# EAGLE board simple-bug-bc547 (EAGLE 7.6.0)
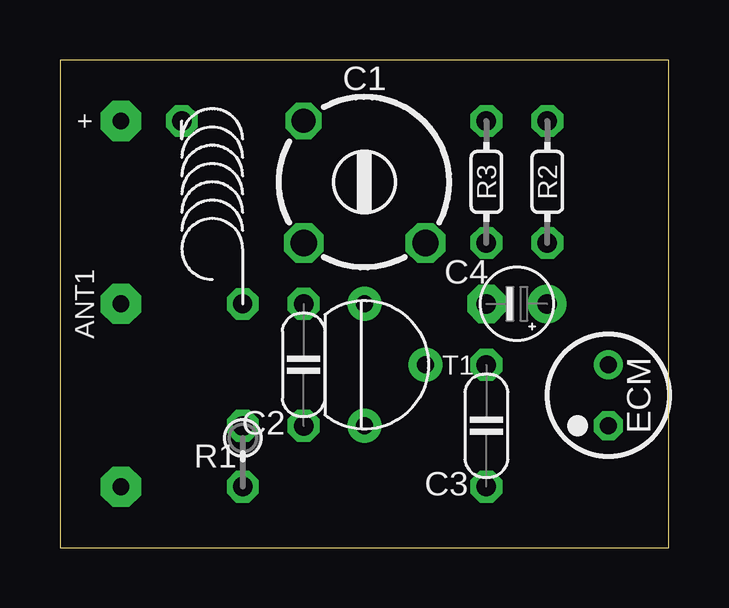
[diagram p0: board, top side]
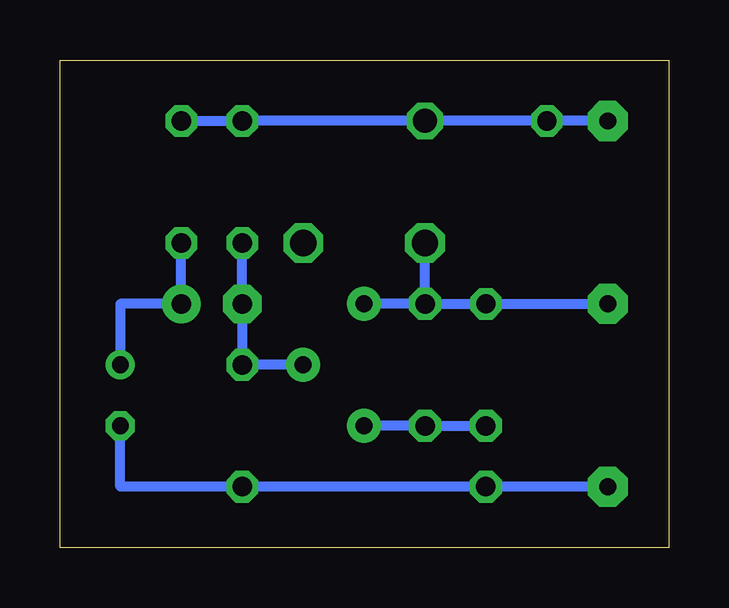
[diagram p1: board, bottom side, seen from below]

Size 25.38 x 20.32 mm. Coordinates in mm from the lower left corner, seen from the top.
Outline: 0,0 25.38,0 25.38,20.32 0,20.32 0,0
Copper layers (1*16): Top 0.035mm / dielectric 1.5mm / Bottom 0.035mm
Design rules "default": minimum track width 10mil, minimum drill 24mil, track to track 8mil, track to pad 8mil, pad to pad 8mil, via to via 8mil, smd to smd 8mil, copper to edge 40mil, drill to drill 8mil, minimum pad ring 10mil, minimum via ring 8mil, stop-mask expansion 4mil, vias tented up to drill 0mil, thermal gap 10mil
Net classes: 0 default: width 0.406 mm

## Footprints (pad centres in the part's own frame; a part is rotated, then mirrored left to right if it is on the bottom)
SPAD = drill 0.7 pad 1.676 octagon: P 0,0
TRIM808-45 = drill 1.1 octagon: 1 2.54,-2.54; 2 -2.54,-2.54 | drill 1 octagon: 3 -2.54,2.54
C050-020X036 = drill 0.813 octagon: 1 0,2.54; 2 0,-2.54
E2,5-3 = drill 0.813 pad 1.6: + 1.27,0 | drill 0.813 pad 1.6 octagon: - -1.27,0
ECM-5 = drill 0.7 pad 1.2 octagon: 1 0,1.27 | drill 0.7 pad 1.2: 2 0,-1.27
L-04/7 = drill 0.8 octagon: 1 -1.27,3.81; 2 1.27,-3.81
0202V = drill 0.813 octagon: 1 0,-1.27; 2 0,1.27
0202/5 = drill 0.813 octagon: 1 0,-2.54; 2 0,2.54
TO92-CBE-A = drill 0.7 pad 1.422: B -2.54,0; C 0,-2.54; E 0,2.54

## Placement (x,y rotation side)
+  SPAD  [SPAD]  2.54,17.78 180 top
ANT1  ANT  [SPAD]  2.54,10.16 180 top
C1  C-TR-PH20127-45-2P23  [TRIM808-45]  12.7,15.24 0 top
C2  4.7pF  [C050-020X036]  10.16,7.62 0 top
C3  1nF  [C050-020X036]  17.78,5.08 0 top
C4  [E2,5-3]  19.05,10.16 0 top
ECM  ECM-5  [ECM-5]  22.86,6.35 180 top
L1  1uH  [L-04/7]  6.35,13.97 0 top
R1  [0202V]  7.62,3.81 0 top
R2  22k  [0202/5]  20.32,15.24 0 top
R3  47k  [0202/5]  17.78,15.24 0 top
T1  BC547  [TO92-CBE-A]  12.7,7.62 180 top
̶̶  SPAD  [SPAD]  2.54,2.54 180 top

## Library data of the parts
+ ANT1 ̶̶ = pad
C1 = cap-trim
C2-C4 = c
ECM = ECM
L1 R1-R3 = r
T1 = t

## Nets
+UB: +.P C1.3 L1.1 R2.2 R3.2
GND: C3.2 ECM.1 R1.1 ̶̶.P
N$1: ANT1.P C1.2 C2.1 L1.2 T1.C
N$3: C2.2 R1.2 T1.E
N$5: C3.1 C4.- R3.1 T1.B
N$6: C4.+ ECM.2 R2.1

## Tracks (layer width: path | path; a pad name or v marks a point on that pad's centre or on a via)
+UB
  Bottom 0.406: R2.2 R3.2 C1.3 L1.1 +.P
GND
  Bottom 0.406: ECM.1 22.86,2.54 C3.2 R1.1 ̶̶.P
N$1
  Bottom 0.406: C2.1 L1.2 ANT1.P | C2.1 T1.C | C2.1 C1.2
N$3
  Bottom 0.406: R1.2 C2.2 T1.E
N$5
  Bottom 0.406: T1.B C3.1 C4.- R3.1
N$6
  Bottom 0.406: ECM.2 22.86,10.16 C4.+ R2.1